# Altium PCB PCB1.PcbDoc
Units mm, origin at the board's own origin, x right, y up, seen from the top; angles counter-clockwise.
Board outline 103.63 x 74.17 mm, 4 copper layers (L1[SGN], L2[GND], L3[GND], L4[SGN]), stack 1.591 mm thick; 62 components, 49 nets, 238 pads, 79 vias.
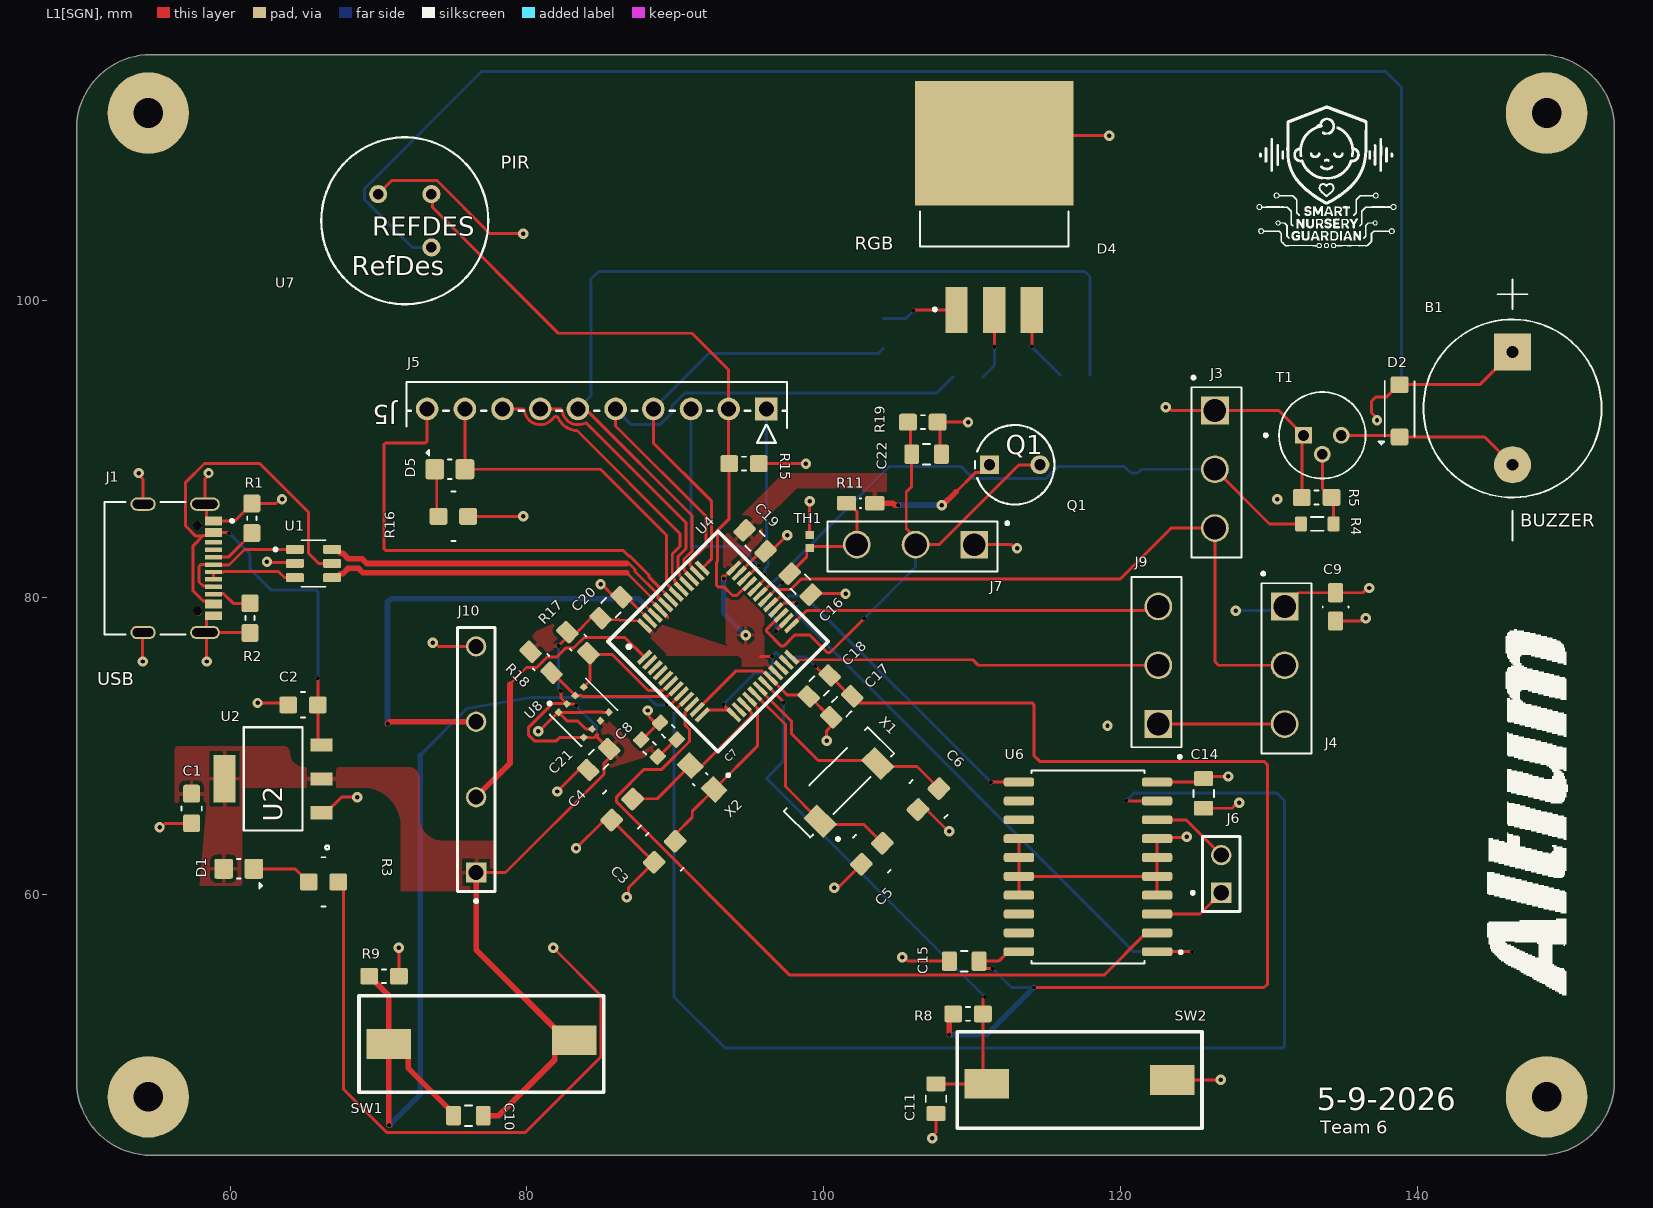
[diagram p0: L1[SGN] view]
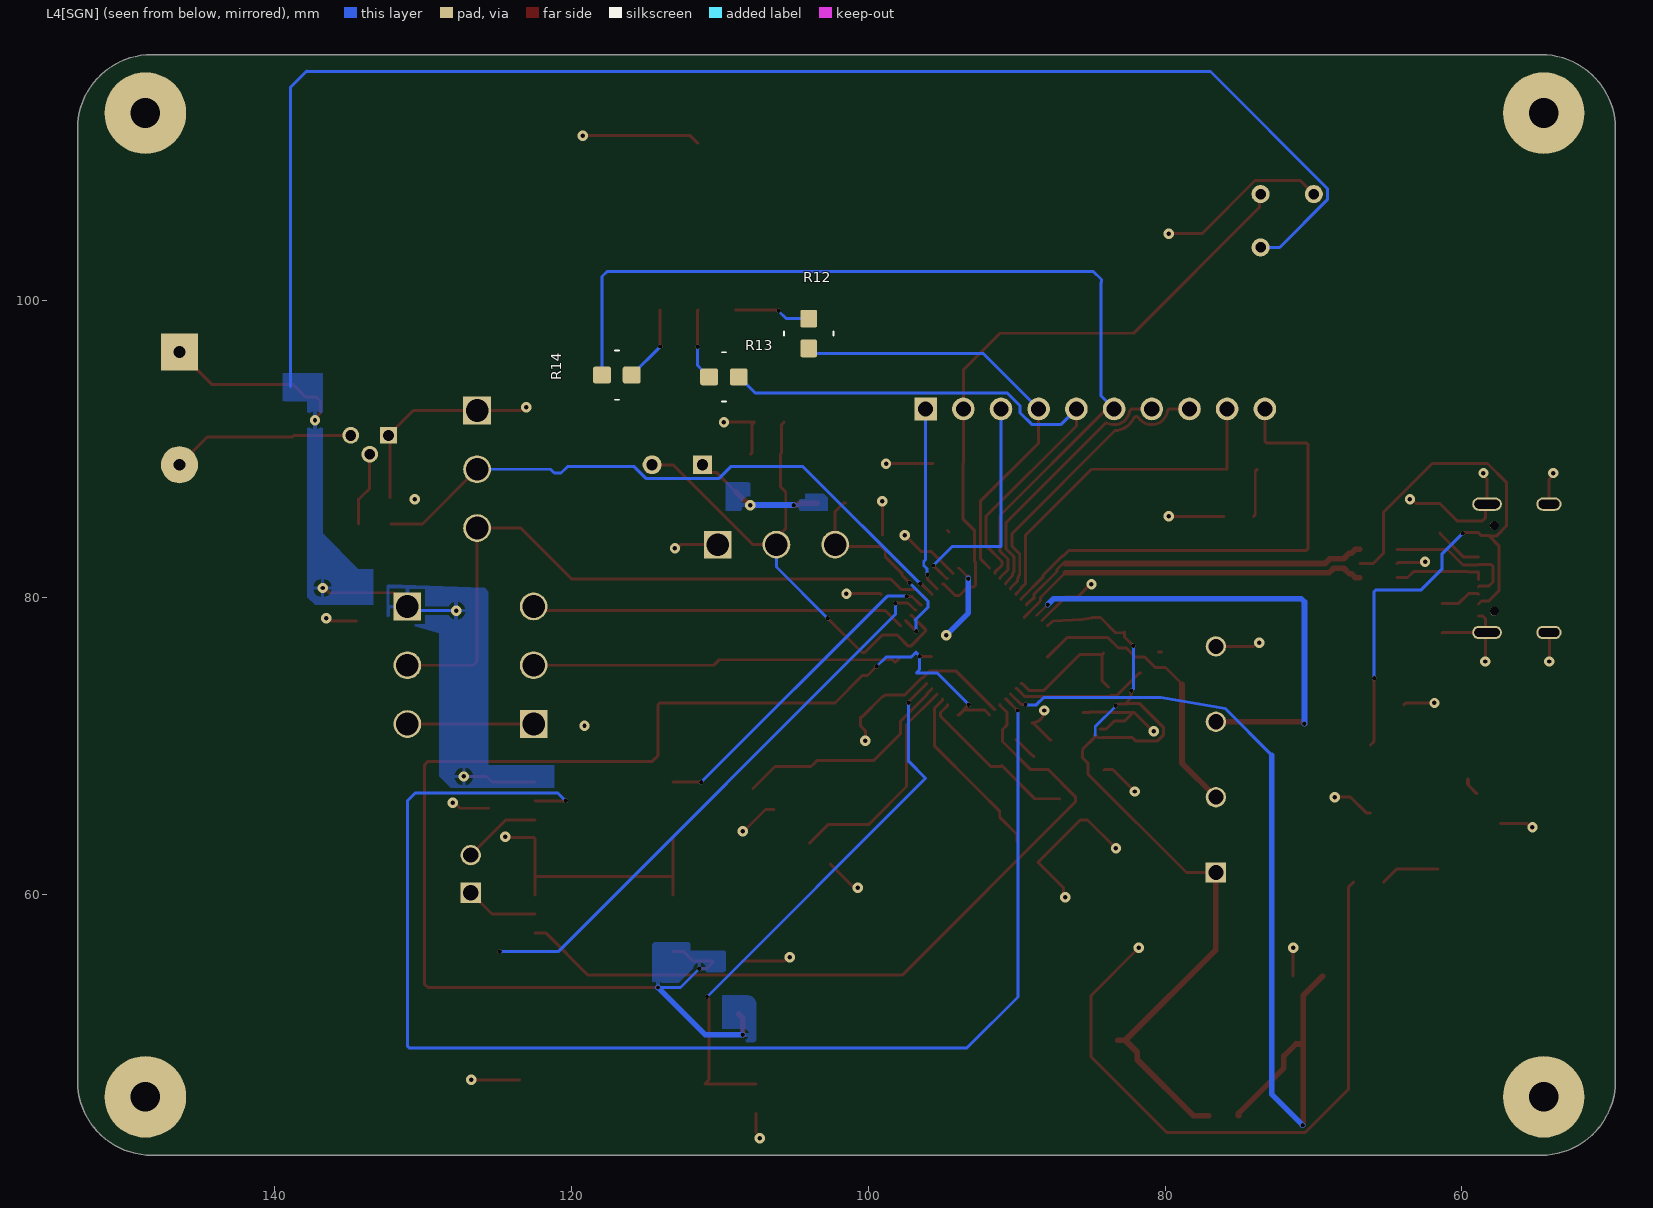
[diagram p1: L4[SGN] view, seen from below]
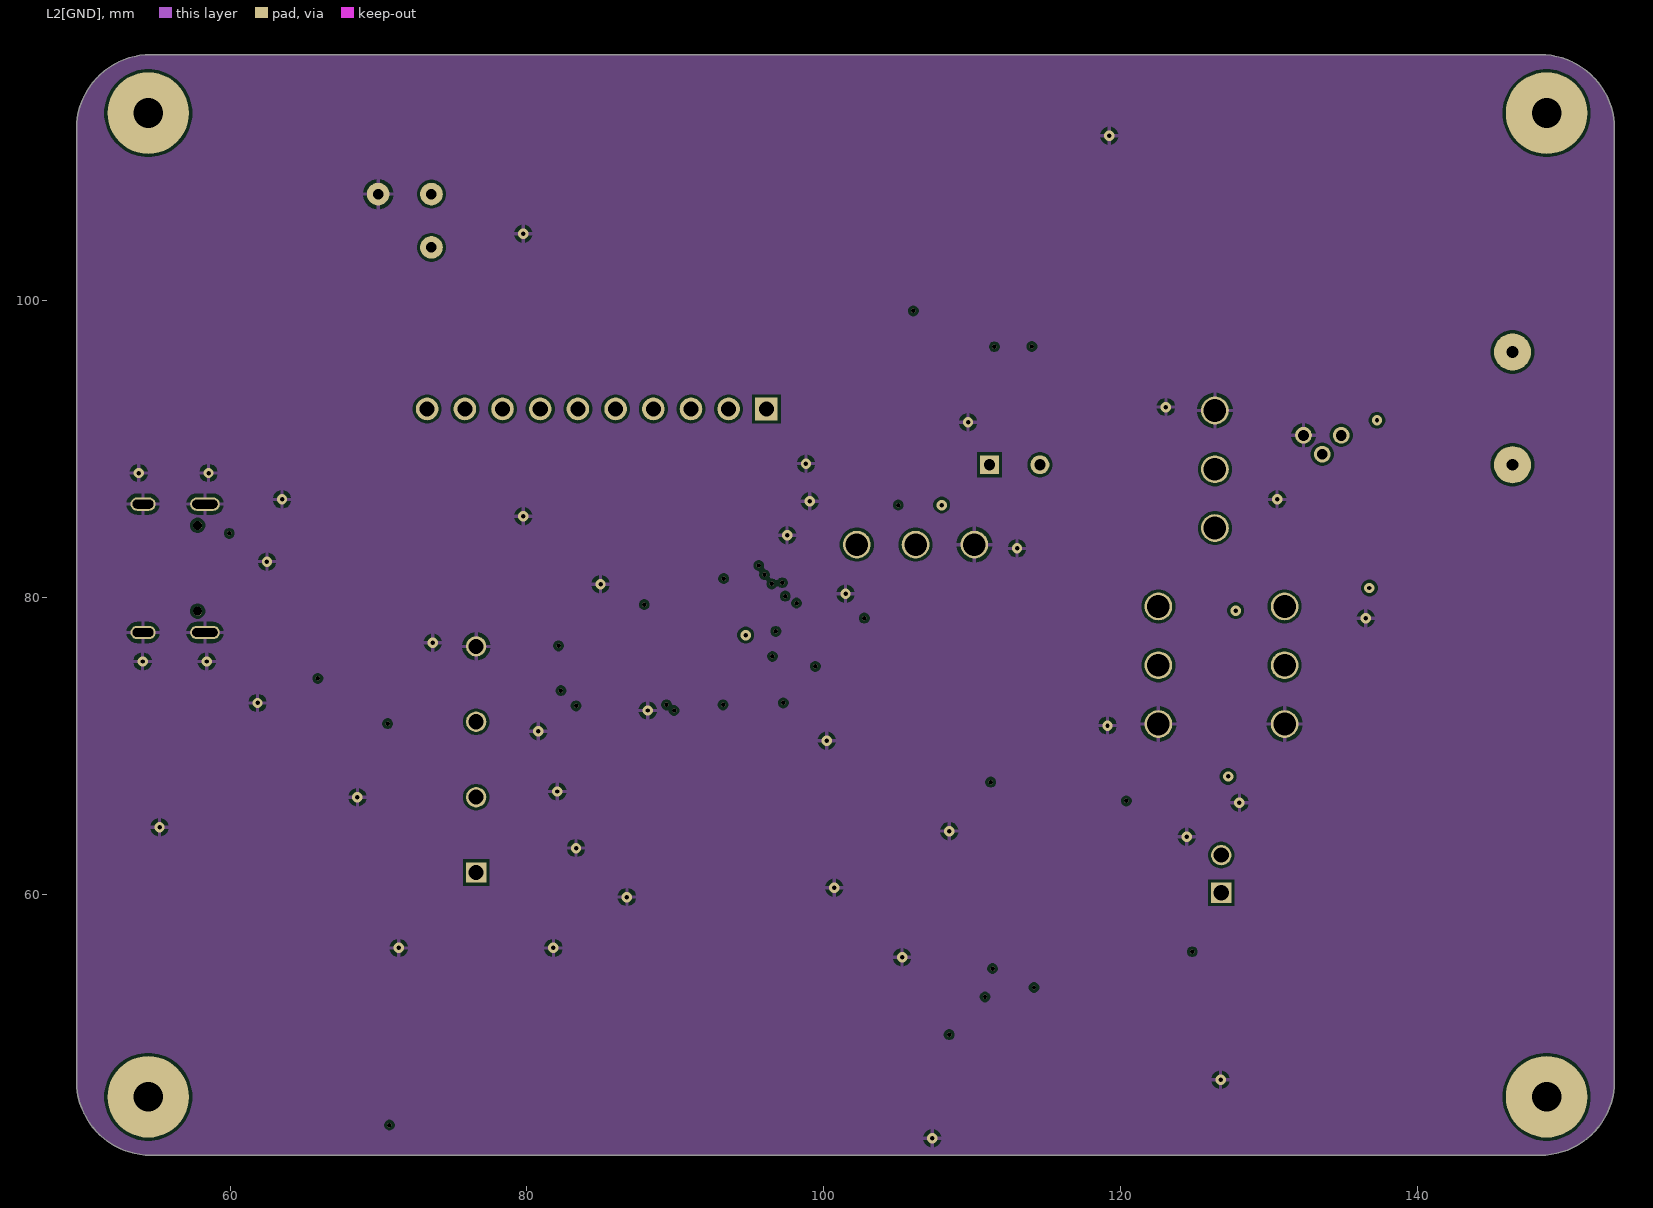
[diagram p2: L2[GND]]
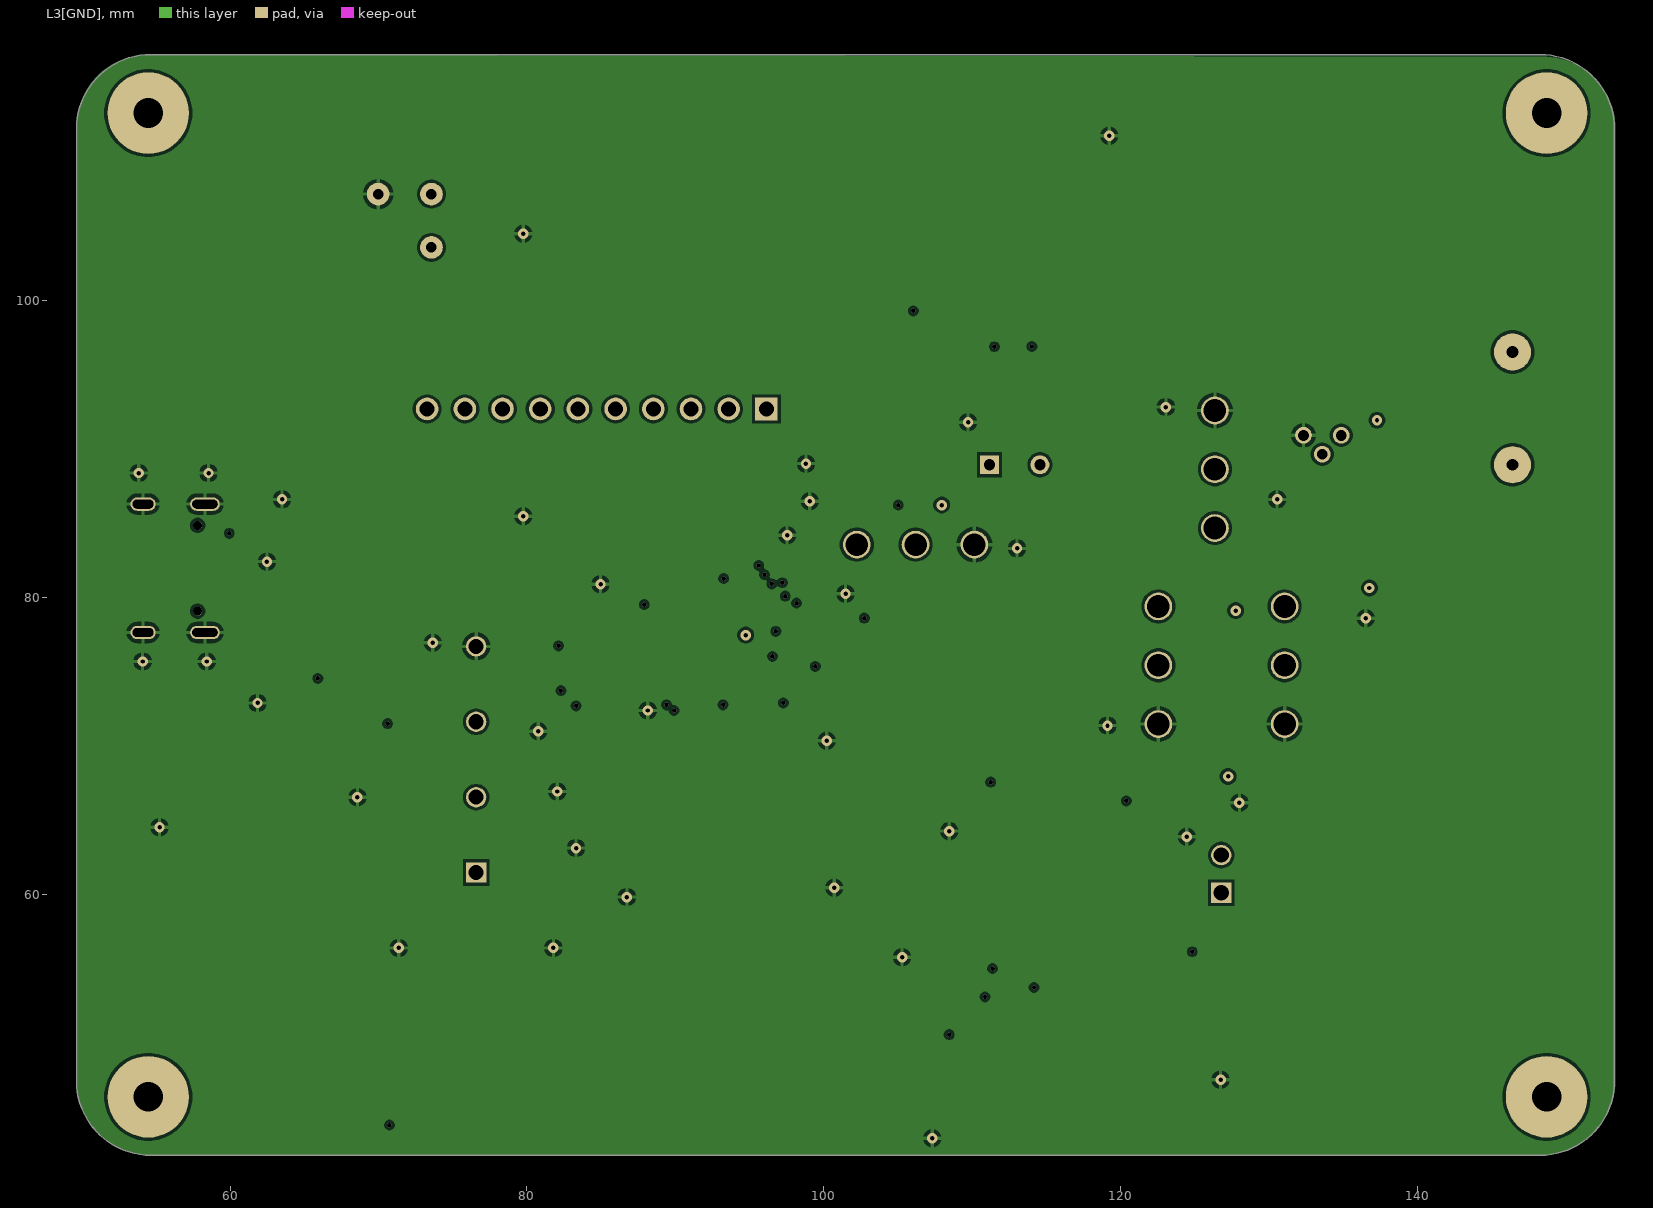
[diagram p3: L3[GND]]

## Layer stack, top to bottom
Top Solder: solder mask 0.0254, SM-001, Dk 4
L1[SGN]: signal copper 0.035
Dielectric 2: prepreg 0.2104, PP-017, Dk 4.3
L2[GND]: signal copper 0.0175
Dielectric 3: core 1.065, Core-039, Dk 4.6
L3[GND]: signal copper 0.0175
Dielectric 4: prepreg 0.2104, PP-017, Dk 4.3
L4[SGN]: signal copper 0.035
Bottom Solder: solder mask 0.0254, SM-001, Dk 4

## Board outline
49.657,47.418 49.657,111.586 cw(c54.657,111.586) 54.657,116.586 148.289,116.586 cw(c148.289,111.586) 153.289,111.586 153.289,47.418 cw(c148.289,47.418) 148.289,42.418 54.657,42.418 cw(c54.657,47.418)

## Design rules (kind name [scope] priority, off if disabled: settings)
Clearance [All] p1: gap=0.2 ignorepadtopadclearanceinfootprint=FALSE
ComponentClearance [All] p1: gap=0.254 collisioncheckmode=3 verticalgap=0.254 showdistances=FALSE checkcomponentboundary=TRUE
DiffPairsRouting [All] p1: maxlimit=0.254 minlimit=0.254 mostfreqgap=0.254 toplayer_minwidth=0.2 toplayer_maxwidth=0.381 toplayer_prefwidth=0.381 midlayer1_minwidth=0.2 midlayer1_maxwidth=0.381 midlayer1_prefwidth=0.381 midlayer2_minwidth=0.2 midlayer2_maxwidth=0.381 midlayer2_prefwidth=0.381 bottomlayer_minwidth=0.2 bottomlayer_maxwidth=0.381 bottomlayer_prefwidth=0.381 maxuncoupledlength=12.7
MinimumSolderMaskSliver [All] p1: minsoldermaskwidth=0.1
NetAntennae [All] p1: netantennaetolerance=1
PolygonConnect [All] p1: connectstyle=Relief reliefconductorwidth=0.254 reliefentries=4 polygonreliefangle="90 Angle" airgapwidth=0.254
RoutingVias [All] p1: holewidth=0.3 width=0 viastyle="Through Hole" minholewidth=0.15 minwidth=0.25 maxholewidth=0.5 maxwidth=0.9
SilkToSolderMaskClearance [IsPad] p1: minsilkscreentomaskgap=0.15 clearancetoexposedcopper=FALSE
SolderMaskExpansion [All] p1: expansion=0 istentingtop=FALSE
SupplyNets "Schematic Supply Nets_3" [InNet('VBUS')] p1: voltage=0.000
SupplyNets "Schematic Supply Nets_2" [InNet('+3V3')] p2: voltage=0.000
SupplyNets "Schematic Supply Nets_1" [InNet('GND')] p3: voltage=0.000
SupplyNets "Schematic Supply Nets" [InNet('+5')] p4: voltage=0.000
UnRoutedNet [All] p1: checkbadconnections=TRUE
Width [All] p1: maxlimit=2 minlimit=0.15 preferedwidth=0.2
24 further rules are at their usual default settings.

## Classes and differential pairs
component class MCU: B1 C3 C4 C5 C6 C7 C8 C9 C10 C11 C14 C15 C16 C17 C18 C19 C20 C21 C22 D2 D4 D5 J3 J4 J5 J6 J7 J9 J10 Q1 R4 R5 R8 R9 R11 R12 R13 R14 R15 R16 R17 R18 R19 SW1 SW2 T1 TH1 U4 U6 U7 U8 X1 X2
component class "LDO & USB": C1 C2 D1 J1 R1 R2 R3 U1 U2
differential pair USB: +USB_P -USB_N
differential pair ESD: +ESD_P -ESD_N

## Components (designator, comment, footprint, x,y, rotation, side; value= is the part's Value field where it differs from the comment)
B1 "Buzzer" Buzzer 146.431,92.837 r270 top
C1 "C-22uF" C-22uF 57.404,65.786 r90 top
C2 "C-10uF" C-10uF 64.913,72.771 r0 top
C3 "C-10pF" C-10pF 89.281,62.865 r45 top
C4 "C-10pF" C-10pF 86.415,65.714 r45 top
C5 "C-11pF" C-10pF 103.251,62.738 r45 top
C6 "C-11pF" C-10pF 107.061,66.421 r45 top
C7 "C-1uF" CAPC0804X80N 89.535,70.993 r315 top
C8 "C-10nF" CAPC0804X80N 88.265,69.85 r315 top
C9 "C-100uF" CAPC1709X35N 134.493,79.375 r270 top
C10 "C-100nF" CAPC1007X45N 76.057,45.085 r0 top
C11 "C-100nF" CAPC1007X45N 107.569,46.228 r90 top
C14 "C-100nF" CAPC1007X45N 125.603,66.802 r90 top
C15 "C-100nF" CAPC1007X45N 109.474,55.499 r180 top
C16 "C-100nF" CAPC1007X45N 98.425,80.899 r135 top
C17 "C-4.7uF" CAPC1007X45N 101.219,72.644 r45 top
C18 "C-100nF" CAPC1007X45N 99.695,74.041 r45 top
C19 "C-100nF" CAPC1007X45N 95.377,83.82 r135 top
C20 "C-100nF" CAPC1007X45N 85.67,79.32 r225 top
C21 "C-100nF" CAPC1007X45N 84.836,69.088 r45 top
C22 "C-100nF" CAPC1007X45N 106.934,89.662 r180 top
D1 "Green LED" "Green LED" 60.583,61.722 r180 top
D2 "1N4148" DIOM3413X180N 138.811,92.583 r90 top
D4 "RGB" RGB 111.379,105.156 r0 top
D5 "Yellow LED" "Green LED" 74.803,88.646 r0 top
J1 "USB Type-C" USB_Type-C 55.245,82.423 r270 top
J3 "3 PIN Header" "PIN 3 Header" 128.671,92.921 r90 top
J4 "Servo motor" "PIN 3 Header" 133.37,79.713 r90 top
J5 "10 PIN Header" "10 PIN HEADER" 84.683,86.996 r180 top
J6 "DC Motor" "2 PIN Header" 126.746,61.468 r0 top
J7 "3 PIN Header" "PIN 3 Header" 110.47,81.26 r0 top
J9 "3 PIN Header" "PIN 3 Header" 120.249,71.163 r270 top
J10 "4 PIN Header" "Header 4pin" 64.994,71.379 r90 top
Q1 "LDR" LDR 112.268,88.646 r0 top
R1 "R-5.1K" R-5.1K 61.468,85.344 r270 top
R2 "R-5.1K" R-5.1K 61.341,78.613 r90 top
R3 "R 220" R-220 66.294,60.833 r180 top
R4 "R-1K" RESC0804X45N 133.266,84.963 r0 top
R5 "R-10K" R-10K 133.223,86.741 r0 top
R8 "R-10K" R-10K 109.728,51.943 r0 top
R9 "R-10K" R-10K 70.374,54.483 r180 top
R11 "R-100K" RESC0503X35N 102.489,86.36 r0 top
R12 "R 220" R-220 104.013,97.79 r270 bottom
R13 "R 220" R-220 109.728,94.869 r180 bottom
R14 "R 220" R-220 116.951,94.996 r0 bottom
R15 "R-10K" R-10K 94.631,89.027 r180 top
R16 "R 220" R-220 75.041,85.471 r180 top
R17 "R-4.7K" RESC1007X50N 83.439,76.962 r315 top
R18 "R-4.7K" RESC1007X50N 80.954,75.637 r135 top
R19 "R-10K" R-10K 106.68,91.821 r180 top
SW1 "SWITCH" SWITCH 75.935,70.915 r0 top
SW2 "SWITCH" SWITCH 118.248,26.494 r180 top
T1 "2N2222" 2N2222 133.716,91.19 r0 top
TH1 "NTC Thermistor" NTC 97.294,83.527 r270 top
U1 "ESD" ESD 65.532,82.423 r0 top
U2 "LDO 3.3" "LDO 3.3" 63.627,67.818 r90 top
U4 "STM32F103C8T6" STM32 92.71,77.216 r45 top
U6 "L293D" L293D 117.811,61.861 r180 top
U7 "PIR" PIR 71.879,105.358 r0 top
U8 "Gas sensor" "Gas sensor" 83.82,72.136 r135 top
X1 "Crystal 32KHz" "Crystal 32KHz" 100.457,67.691 r135 top
X2 "Crystal 8MHz" "crystal 8Mz" 91.186,67.437 r225 top

## Footprints (in the part's own frame and the unit in brackets; to place one, negate y for a bottom-side part, rotate by r counter-clockwise, add the part's x,y. Pads: shape width x height; smd on the part's side, far side on the other; paste and mask are expansions set on the pad)
"2 PIN Header" [mm]
  rect 1.37x1.37 hole 1.02: 1(0.047,-1.365)
  round 1.37 hole 1.02: 2(0.047,1.175)
  silkscreen extent -1.97,-2.64 1.32,2.44, body extent -1.22,-2.76 1.32,2.32, height 3.94
2N2222 [mm]
  rect 1.13x1.13 / inner round 1.13 / far side rect 1.13x1.13 hole 0.73 mask+0.102: 1(-1.382,-0.258)
  round 1.13 hole 0.73 mask+0.102: 2(-0.112,-1.528) 3(1.158,-0.258)
  silkscreen extent -4.02,-3.17 2.81,2.66, body extent -3.13,-3.05 2.68,2.76, height 5.33
"10 PIN HEADER" [mil]
  rect 60x60 hole 40 paste-99999 mask+0: 1(-451.02,-224.96)
  round 60 hole 40 paste-99999 mask+0: 2(-351.02,-224.96) 3(-251.02,-224.96) 4(-151.02,-224.96) 5(-51.02,-224.96) 6(48.98,-224.96) 7(148.98,-224.96) 8(248.98,-224.96) 9(348.98,-224.96) 10(448.98,-224.96)
  silkscreen extent -506,-297 504,-135, body extent -501,-274 499,-176, height 335
Buzzer [mm]
  round 2.5 hole 0.8: N(3.89,-0.011)
  rect 2.5x2.5 / inner round 2.5 / far side rect 2.5x2.5 hole 0.8: P(-3.71,-0.011)
  silkscreen extent -8.6,-6.01 9.01,5.99, body extent -5.91,-6.01 6.09,5.99, height 7
C-10pF [mm] "Chip Capacitor, 2-Leads, Body 2.45x1.75mm, IPC Medium Density"
  rrect25% 1.2x1.14 smd: 1(-1,0) 2(1,0)
  silkscreen extent -0.14,-1.66 0.14,1.66, body extent -1.23,-0.88 1.22,0.88, height 0.85
C-10uF [mm] "Chip Capacitor, 2-Leads, Body 1.68x0.88mm, IPC Medium Density"
  rrect25% 1.2x1.14 smd: 1(-1,0) 2(1,0)
  silkscreen extent -0.14,-0.86 0.14,0.86, body extent -0.84,-0.44 0.84,0.44, height 0.7
C-22uF [mm] "Chip Capacitor, 2-Leads, Body 1.10x0.73mm, IPC Medium Density"
  rrect25% 1.2x1.14 smd: 1(-1,0) 2(1,0)
  silkscreen extent -0.14,-0.69 0.14,0.69, body extent -0.55,-0.36 0.55,0.36, height 0.7
CAPC0804X80N [mm] "Chip Capacitor, 2-Leads, Body 0.85x0.45mm, IPC Medium Density"
  rrect25% 0.8x0.9 smd: 1(-0.8,0) 2(0.8,0)
  silkscreen extent -0.14,-0.46 0.14,0.46, body extent -0.43,-0.23 0.42,0.22, height 0.8
CAPC1007X45N [mm] "Chip Capacitor, 2-Leads, Body 1.05x0.68mm, IPC Medium Density"
  rrect25% 1x1.3 smd: 1(-1,0) 2(1,0)
  silkscreen extent -0.24,-0.69 0.24,0.69, body extent -0.53,-0.34 0.53,0.34, height 0.45
CAPC1709X35N [mm] "Chip Capacitor, 2-Leads, Body 1.70x0.90mm, IPC Medium Density"
  rrect25% 1.3x1 smd: 1(-0.95,0) 2(0.95,0)
  silkscreen extent -0.04,-0.86 0.04,0.86, body extent -0.85,-0.45 0.85,0.45, height 0.35
"crystal 8Mz" [mm]
  rect 1.2x1.4 smd: 1(-0.753,1.271) 2(-0.75,-1)
  silkscreen extent -2.2,0 0,1.37, body extent -1.5,-1.6 0,1.6, height 0.25
"Crystal 32KHz" [mm]
  rect 1.9x1.3 smd paste+0 mask+0.102: 1(-1.46,2.445) 2(-1.46,-3.055)
  silkscreen extent -3.26,-4.31 0.75,3.7, body extent -1.71,-4.31 0.75,3.7, height 0.25
DIOM3413X180N [mm] "Molded Diode, 2-Leads, Body 3.45x1.30mm, IPC Medium Density"
  rrect25% 1.125x1.2 smd: A(-1.763,0) K(1.762,0)
  silkscreen extent -2.26,-1 2,1.42, body extent -1.73,-0.65 1.72,0.65, height 1.8
ESD [mm]
  rrect25% 1.21x0.59 smd: 1(-1.168,0.823) 2(-1.168,-0.127) 3(-1.168,-1.077) 4(1.342,-1.077) 5(1.342,-0.127) 6(1.342,0.823)
  silkscreen extent -2.57,-1.69 0.9,1.44, body extent -1.31,-1.59 1.49,1.34, height 0.4
"Gas sensor" [mm]
  rect 0.4x0.4 smd: 1(1.287,1.101) 2(1.287,0.301) 3(1.287,-0.499) 4(1.287,-1.299) 5(-1.113,-1.299) 6(-1.113,-0.499) 7(-1.113,0.301) 8(-1.113,1.101)
  silkscreen extent -1.41,-1.82 2.23,1.62, body extent -1.41,-1.6 1.59,1.4, height 1
"Green LED" [mm] "MELF Diode, 2-Leads, Body 2.25x1.10mm, IPC Medium Density"
  rrect25% 1.275x1.35 smd: 1(-1.012,0) 2(1.012,0)
  silkscreen extent -1.59,-0.66 0.11,1.32, body extent -1.25,-0.6 1.25,0.6, height 1.2
"Header 4pin" [mm]
  rect 1.37x1.37 hole 1.02: 1(-9.911,-11.587)
  round 1.37 hole 1.02: 2(-4.831,-11.587) 3(0.249,-11.587) 4(5.329,-11.587)
  silkscreen extent -11.93,-12.86 6.6,-10.32, body extent -11.2,-12.75 6.7,-10.21, height 8.38
L293D [mm]
  rrect50% 2.05x0.6 smd: 1(-4.656,5.727) 2(-4.656,4.457) 3(-4.656,3.187) 4(-4.656,1.917) 5(-4.656,0.647) 6(-4.656,-0.623) 7(-4.656,-1.893) 8(-4.656,-3.163) 9(-4.656,-4.433) 10(-4.656,-5.703) 11(4.654,-5.703) 12(4.654,-4.433) 13(4.654,-3.163) 14(4.654,-1.893) 15(4.654,-0.623) 16(4.654,0.647) 17(4.654,1.917) 18(4.654,3.187) 19(4.654,4.457) 20(4.654,5.727)
  silkscreen extent -6.35,-6.49 3.8,6.51, body extent -5.16,-6.39 5.16,6.41, height 2.65
"LDO 3.3" [mil]
  rect 35x58 smd paste+0 mask+0: 1(-91.57,-99.72) 2(-1.42,-99.72) 3(88.74,-99.72)
  rect 126x58 smd paste+0 mask+0: 4(-1.42,157.28)
  silkscreen extent -188,-120 136,107, body extent -133,-115 131,172, height 71
LDR [mm]
  rect 1.27x1.27 hole 0.762 paste-2539.97 mask+0: 1(-1.095,0.302)
  round 1.27 hole 0.762 paste-2539.97 mask+0: 2(2.305,0.302)
  silkscreen extent -2.07,-2.38 3.28,2.98, body extent -1.95,-2.25 3.19,2.85, height 2.4
NTC [mm]
  rect 0.54x0.6 smd: 1(-0.674,1.766) 2(0.19,1.766)
  body extent -0.74,1.52 0.26,2.02, height 0.55
"PIN 3 Header" [mm]
  rect 1.87x1.87 / inner round 1.87 / far side rect 1.87x1.87 hole 1.52 mask+0.102: 1(-0.315,2.306)
  round 1.87 hole 1.52 mask+0.102: 2(-4.275,2.306) 3(-8.235,2.306)
  silkscreen extent -10.22,0.51 2,3.88, body extent -9.5,1 0.66,3.54, height 6.5
PIR [mil]
  round 48 / inner round 60 / far side round 48 hole 28 paste-99999 mask+0: 1(-74.88,72.05) 2(66.54,72.05) 3(66.54,-69.37)
  silkscreen extent -226,-220 217,223, body extent -221,-215 212,218, height 567
R-5.1K [mm] "Chip Resistor, 2-Leads, Body 0.53x0.28mm, IPC Medium Density"
  rrect25% 1.2x1.14 smd: 1(-1,0) 2(1,0)
  silkscreen extent -0.14,-0.31 0.14,0.31, body extent -0.26,-0.14 0.26,0.14, height 0.45
R-10K [mm] "Chip Resistor, 2-Leads, Body 0.85x0.45mm, IPC Medium Density"
  rrect25% 1.2x1.14 smd: 1(-1,0) 2(1,0)
  silkscreen extent -0.14,-0.46 0.14,0.46, body extent -0.43,-0.23 0.43,0.22, height 0.45
R-220 [mm] "Chip Resistor, 2-Leads, Body 3.22x1.70mm, IPC Medium Density"
  rrect25% 1.2x1.14 smd: 1(-1,0) 2(1,0)
  silkscreen extent -0.14,-1.66 0.14,1.66, body extent -1.61,-0.85 1.61,0.85, height 0.55
RESC0503X35N [mm] "Chip Resistor, 2-Leads, Body 0.53x0.28mm, IPC Medium Density"
  rrect25% 1.3x1 smd: 1(-0.95,0) 2(0.95,0)
  silkscreen extent -0.04,-0.31 0.04,0.31, body extent -0.26,-0.14 0.26,0.14, height 0.35
RESC0804X45N [mm] "Chip Resistor, 2-Leads, Body 0.85x0.45mm, IPC Medium Density"
  rrect25% 0.8x1 smd: 1(-1.1,0) 2(1.1,0)
  silkscreen extent -0.44,-0.46 0.44,0.46, body extent -0.43,-0.23 0.43,0.22, height 0.45
RESC1007X50N [mm] "Chip Resistor, 2-Leads, Body 1.05x0.68mm, IPC Medium Density"
  rrect25% 1.3x1 smd: 1(-1,0) 2(1,0)
  silkscreen extent -0.09,-0.69 0.09,0.69, body extent -0.53,-0.34 0.53,0.34, height 0.5
RGB [mm]
  rect 1.5x3.1 smd: 1(-2.43,-5.787) 2(0.11,-5.787) 3(2.65,-5.787)
  rect 10.7x8.4 smd: 4(0.11,5.463)
  silkscreen extent -4.89,-5.84 5.11,0.86, body extent -4.89,-6.76 5.11,9.09, height 3.3
STM32 [mm]
  rect 0.3x1.2 smd paste-2539.97: 1(-2.75,-4.5) 2(-2.25,-4.5) 3(-1.75,-4.5) 4(-1.25,-4.5) 5(-0.75,-4.5) 6(-0.25,-4.5) 7(0.25,-4.5) 8(0.75,-4.5) 9(1.25,-4.5) 10(1.75,-4.5) 11(2.25,-4.5) 12(2.75,-4.5) 25(2.75,4) 26(2.25,4) 27(1.75,4) 28(1.25,4) 29(0.75,4) 30(0.25,4) 31(-0.25,4) 32(-0.75,4) 33(-1.25,4) 34(-1.75,4) 35(-2.25,4) 36(-2.75,4)
  rect 1.2x0.3 smd paste-2539.97: 13(4.25,-3) 14(4.25,-2.5) 15(4.25,-2) 16(4.25,-1.5) 17(4.25,-1) 18(4.25,-0.5) 19(4.25,0) 20(4.25,0.5) 21(4.25,1) 22(4.25,1.5) 23(4.25,2) 24(4.25,2.5) 37(-4.25,2.5) 38(-4.25,2) 39(-4.25,1.5) 40(-4.25,1) 41(-4.25,0.5) 42(-4.25,0) 43(-4.25,-0.5) 44(-4.25,-1) 45(-4.25,-1.5) 46(-4.25,-2) 47(-4.25,-2.5) 48(-4.25,-3)
  silkscreen extent -5.25,-5.5 5.25,5, body extent -4.6,-4.85 4.6,4.35, height 1.6
SWITCH [mm]
  rect 3x2 smd paste-2539.97: 1(-5.25,-21) 2(7.25,-20.75)
  silkscreen extent -7.25,-24.25 9.25,-17.75, body extent -5.25,-22.9 7.25,-18.61, height 4.95
USB_Type-C [mm]
  rect 0.6x1.14 smd mask+0.05: A1(3.65,3.638) A4(2.85,3.638) B1(-2.75,3.638) B4(-1.95,3.638)
  rect 0.3x1.14 smd mask+0.05: A5(2.2,3.638) A6(1.2,3.638) A7(0.2,3.638) A8(-1.3,3.638) B5(-0.3,3.638) B6(0.7,3.638) B7(1.7,3.638) B8(-0.8,3.638)
  oval 0.9x2 hole 0.6 slot 1.7 at 90 deg: S1(-3.875,3.058) S2(4.775,3.058)
  oval 0.9x1.7 hole 0.6 slot 1.4 at 90 deg: S3(-3.875,-1.112) S4(4.775,-1.112)
  round 0.6 hole 0.6 unplated: ""(-2.44,2.568) ""(3.34,2.568)
  silkscreen extent -4.02,-3.71 4.92,4.99, body extent -4.02,-3.71 4.92,4.19, height 3.31

## Part data
B1: "Through Hole Alarms, Buzzers, and Sirens RoHS", MFR=CUI, MFR PART#=CMI-1210-5-95T, ComponentLink1Description="New link", ComponentLink1URL=https://www.lcsc.com/product-detail/C6485139.html?s_z=n_q_CMI-1210-5-95T&spm=wm.fly.bg.0.xh&lcsc_vid=T1EIXgIEFgJdUgdfFAVeA1ADFlcIAQJWFVRdA1ZXFlMxVlNeT1JbX1FfQ1lXVDsOAxUeFF5JWBYZEEoKFBINSQcJGk4eFQsCAgIaSgADAwAHC0slRlNXVlFXWQkaCgg%3D, SUPPLIER=LCSC, SUPPLIER PART#=C6485139
C1: MFR=muRata, ComponentLink1Description="New link", ComponentLink2Description="New link 1", ComponentLink2URL=https://www.lcsc.com/product-detail/C86816.html?s_z=n_q_t_Capacitor%252022uf&spm=wm.fly.bg.0.cbh___wm.ssy.tc.0.tz&lcsc_vid=QgVYVVJWE1VfXwZQRQQNBFIETgIPBFxQQFYPXlAFEgMxVlNeQFVeXlFSR1laVzsOAxUeFF5JWBYZEEoKFBINSQcJGk4eFQsCAgIaSgADAwAHC0slRlJbX1FIHxUDCw%3D%3D, MJFR PART #=GRM21BR61E226ME44L, SUPPLIER=LCSC, SUPPLIER PART #=C86816
C2: MFR="Samsung Electro-Mechanics", MFR PART #=CL31A106KBHNNNE, ComponentLink1Description="New link", ComponentLink1URL=https://www.lcsc.com/product-detail/C13585.html?s_z=n_q_t_Capacitor%252010u&spm=wm.fly.bg.0.cbh___wm.ssy.tc.0.tz&lcsc_vid=QgVYVVJWE1VfXwZQRQQNBFIETgIPBFxQQFYPXlAFEgMxVlNeQFVeXldRQVBdXjsOAxUeFF5JWBYZEEoKFBINSQcJGk4dAgUUFAk%3D, SUPPLIER=LCSC, SUPPLIER PART #=C13585
C3 C4: MFR="Samsung Electro-Mechanics", MFR PART #=CL10C100JB8NNNC, ComponentLink1Description="New link", ComponentLink1URL=C1634, SUPPLIER=LCSC, SUPPLIER PART #=C1634
C5 C6: MFR=muRata, MFR PART=GRM0335C1E110JA01D, SUPPLIER=LCSC, SUPPLIER PART #=C2183483
C7: MFR="Samsung Electro-Mechanics", MFR PART#=CL10B105KA8NNNC, ComponentLink1Description="New link", ComponentLink1URL=https://www.lcsc.com/product-detail/C29936.html?s_z=n_q_t_Capacitor%25201uF&spm=wm.fly.bg.0.cbh___wm.ssy.tc.0.tz&lcsc_vid=QgVYVVJWE1VfXwZQRQQNBFIETgIPBFxQQFYPXlAFEgMxVlNeQFJXUFdQT1hcVzsOAxUeFF5JWBYZEEoKFBINSQcJGk4eFQsCAgIaSgADAwAHC0slRlFeV1BUWQkaCgg%3D, SUPPLIER=LCSC, SUPPLIER PART#=C29936
C8: MFR=YAGEO, MFR PART #=CC0603KRX7R9BB103, ComponentLink1Description="New link", ComponentLink1URL=https://www.lcsc.com/product-detail/C100042.html?s_z=n_q_t_capacitor%252010nf&spm=wm.fly.bg.0.cbh___wm.ssy.tc.0.tz&lcsc_vid=QgVYVVJWE1VfXwZQRQQNBFIETgIPBFxQQFYPXlAFEgMxVlNeQFJXUFVVQFVZXjsOAxUeFF5JWBYZEEoKFBINSQcJGk4eFQsCAgIaSgADAwAHC0slRlBWVVxeWQkaCgg%3D, SUPPLIER=LCSC, SUPPLIER PART#=C100042
C9: "CAP CER 100uF 6.3V X5R 1206", MFR="Samsung Electro-Mechanics", MFR PART#=CL31A107MQHNNNE, ComponentLink1Description="New link", ComponentLink1URL=https://www.lcsc.com/product-detail/C15008.html?s_z=n_q_t_Capacitor%2520100u&spm=wm.fly.bg.0.xh___wm.ssy.tc.0.tz&lcsc_vid=T1EIXgIEFgJdUgdfFAVeA1ADFlcIAQJWFVRdA1ZXFlMxVlNeT1JZV1BfR1VbUTsOAxUeFF5JWBYZEEoKFBINSQcJGk4NBhADEA4cHktRTlNADxALGw%3D%3D, SUPPLIER=LCSC, SUPPLIER PART#=C15008
C10 C11 C14 C15 C16 C18 C19 C20 C21 C22: MFR=TDK, MFR PART#=CGA5L2X7R2A104KT0Y0U, ComponentLink1Description="New link", ComponentLink1URL=https://www.lcsc.com/product-detail/C338057.html?s_z=n_q_C338057&globalKeyword=C338057, SUPPLIER=LCSC, SUPPLIER PART#=C338057
C17: MFR=SAMYOUNG, MFR PART #="MVK 50V4.7 5*5.2", ComponentLink1Description="New link", ComponentLink1URL=https://www.lcsc.com/product-detail/C165626.html?s_z=n_q_C165626&globalKeyword=C165626, SUPPLIER=LCSC, SUPPLIER PART #=C165626
D1: MFR=NATIONSTAR, ComponentLink1Description="New link", ComponentLink1URL=https://www.lcsc.com/product-detail/C84260.html?s_z=n_q_t_Green%2520led&spm=wm.fly.bg.0.cbh___wm.ssy.tc.0.tz&lcsc_vid=QgVYVVJWE1VfXwZQRQQNBFIETgIPBFxQQFYPXlAFEgMxVlNeQFVcUVVXTlJaUzsOAxUeFF5JWBYZEEoKFBINSQcJGk4eFQsCAgIaSgADAwAHC0slRlJbX1FIHxUDCw%3D%3D, MFR PART #=NATIONSTAR, SUPPLIER=LCSC, SUPPLIER PART #=C84260
D2: "DIODE GP 100V 200mA DO-35", MFR=onsemi, ComponentLink1Description="New link", ComponentLink1URL=https://www.lcsc.com/product-detail/C258182.html?s_z=n_q_x_1N4148&spm=wm.ssy.em.0.tz&lcsc_vid=T1EIXgIEFgJdUgdfFAVeA1ADFlcIAQJWFVRdA1ZXFlMxVlNeT1JbXlNXRVlfUTsOAxUeFF5JWBYZEEoKFBINSQcJGk4eFQsCAgIaSgADAwAHC0slRVFYVlJVRlhADxALGw%3D%3D, MFR PART#=1N4148, SUPPLIER=LCSC, SUPPLIER PART#=C258182
D4: "12x12 Red, Green, Blue(RGB) LED Dot Matrix and Cluster RoHS", MFR=Inolux, MFR PART#=INCM88001, ComponentLink1Description="New link", ComponentLink1URL=https://www.lcsc.com/product-detail/C7288959.html?s_z=n_q_t_RGB%2520LED&spm=wm.fly.bg.0.xh___wm.ssy.tc.0.tz&lcsc_vid=T1EIXgIEFgJdUgdfFAVeA1ADFlcIAQJWFVRdA1ZXFlMxVlNeT1JYVVBXTlBYVjsOAxUeFF5JWBYZEEoKFBINSQcJGk4eFQsCAgIaSgADAwAHC0slRVRWVlxUWQkaCgg%3D, SUPPLIER=LCSC, SUPPLIER PART#=C7288959
D5: "LED YELLOW WATER CLEAR 0402 SMD", MFR=YONGYUTAI, MFR PART#=YLED0402Y, ComponentLink1Description="New link", ComponentLink1URL=https://www.lcsc.com/product-detail/C20608782.html?s_z=n_q_t_Yellow%2520led&spm=wm.fly.bg.0.xh___wm.ssy.tc.0.tz&lcsc_vid=T1EIXgIEFgJdUgdfFAVeA1ADFlcIAQJWFVRdA1ZXFlMxVlNeT1JYVFBRQFZbUDsOAxUeFF5JWBYZEEoKFBINSQcJGk4eFQsCAgIaSgADAwAHC0slQFNWX11TTk8GEwkK, SUPPLIER=LCSC, SUPPLIER PART#=C20608782
J1: MFR="Korean Hroparts Elec", MFR PART #=TYPE-C-31-M-12, ComponentLink1Description="New link", ComponentLink1URL=https://www.lcsc.com/product-detail/C165948.html?s_z=n_q_p_USB%2520type%2520c&spm=wm.ssy.bg.1.cbh&lcsc_vid=QgVYVVJWE1VfXwZQRQQNBFIETgIPBFxQQFYPXlAFEgMxVlNeQFVeVFZQRVNcVjsOAxUeFF5JWBYZEEoKFBINSQcJGk4eFQsCAgIaSgADAwAHC0slRVBWVFBeRE8GEwkK, SUPPLIER=LCSC, SUPPLIER PART #=C165948
J4: library part "3 PIN Header", ComponentLink1Description="New link"
J6: library part "2 PIN Header", "Pin Header 2 Position Dual Row Through Hole -55℃~+125℃", MFR=Samtec, MFR PART#=MTSW-101-09-L-D-515, ComponentLink1Description="New link", ComponentLink1URL=https://www.lcsc.com/product-detail/C5684114.html?s_z=n_q_MTSW-101-09-L-D-515&spm=wm.fly.bg.0.cbh&lcsc_vid=T1EIXgIEFgJdUgdfFAVeA1ADFlcIAQJWFVRdA1ZXFlMxVlNeT1JYX1JeRVhXUjsOAxUeFF5JWBYZEEoKFBINSQcJGk4eFQsCAgIaSgADAwAHC0slRVhZVlZfRE8GEwkK, SUPPLIER=LCSC, SUPPLIER PART#=C5684114
J10: MFR=hanxia, MFR PART #="HX PH254-01-04-Z-L11.5 straight pin header", ComponentLink1Description="New link", ComponentLink1URL=https://www.lcsc.com/product-detail/C52016392.html?s_z=n_q_t_4%2520PIN%2520Header&spm=wm.fly.bg.0.xh___wm.ssy.tc.0.tz&lcsc_vid=QgVYVVJWE1VfXwZQRQQNBFIETgIPBFxQQFYPXlAFEgMxVlNeQFVcUFVeQFNaVjsOAxUeFF5JWBYZEEoKFBINSQcJGk4eFQsCAgIaSgADAwAHC0slRVNXUVZIHxUDCw%3D%3D, SUPPLIER=LCSC, SUPPLIER PART #=C52016392
Q1: "Silicon NPN Phototransistor, RoHS Compliant", MFR=VISHAY, MFR PART#=TEMT1020, ComponentLink1Description="New link", ComponentLink1URL=https://www.lcsc.com/product-detail/C129151.html?s_z=n_q_TEMT1020&spm=wm.fly.bg.0.xh&lcsc_vid=T1EIXgIEFgJdUgdfFAVeA1ADFlcIAQJWFVRdA1ZXFlMxVlNeT1JbUFFXRVNdVzsOAxUeFF5JWBYZEEoKFBINSQcJGk4NBhADEA4cHktXRVZcSQwSGg0%3D, SUPPLIER=LCSC, SUPPLIER PART#=C129151
R1 R2: MFR=YAGEO, MFR PART #=RC0402FR-075K1L, ComponentLink1Description="New link", ComponentLink1URL=https://www.lcsc.com/product-detail/C105872.html?s_z=n_q_p_Resistance%25205.1K&spm=wm.ssy.bg.0.cbh&lcsc_vid=QgVYVVJWE1VfXwZQRQQNBFIETgIPBFxQQFYPXlAFEgMxVlNeQFVeU1NTRFFbUTsOAxUeFF5JWBYZEEoKFBINSQcJGk4NBhADEA4cHktXRlVcSQwSGg0%3D, SUPPLIER=LCSC, SUPPLIER PART #=C105872
R3 R12 R13 R14 R16: MFR=UNI-ROYAL, MFR PART #=0603WAF2200T5E, ComponentLink1Description="New link", ComponentLink1URL=https://www.lcsc.com/product-detail/C22962.html?s_z=n_q_t_Resistor%2520220&spm=wm.fly.bg.0.cbh___wm.ssy.tc.0.tz&lcsc_vid=QgVYVVJWE1VfXwZQRQQNBFIETgIPBFxQQFYPXlAFEgMxVlNeQFVcUVFXRFlbXjsOAxUeFF5JWBYZEEoKFBINSQcJGk4dAgUUFAk%3D, SUPPLIER=LCSC, SUPPLIER PART #=C22962
R4: MFR=FOJAN, MFR PART #=FRC0603F1001TS, ComponentLink1Description="New link", ComponentLink1URL=https://www.lcsc.com/product-detail/C2907002.html?s_z=n_q_t_Resistor%25201k&spm=wm.fly.bg.0.cbh___wm.ssy.tc.0.tz&lcsc_vid=QgVYVVJWE1VfXwZQRQQNBFIETgIPBFxQQFYPXlAFEgMxVlNeQFRWX1ZeRFddVzsOAxUeFF5JWBYZEEoKFBINSQcJGk4eFQsCAgIaSgADAwAHC0slQlZZVVVXWQkaCgg%3D, SPN=LCSC, SPN PART#=C2907002
R5 R8 R9 R15 R19: MFR=YAGEO, MFR PART#=RC0603FR-0710KL, ComponentLink1Description="New link", ComponentLink1URL=https://www.lcsc.com/product-detail/C98220.html?s_z=n_q_t_Resistor%252010k&spm=wm.fly.bg.0.cbh___wm.ssy.tc.0.tz&lcsc_vid=QgVYVVJWE1VfXwZQRQQNBFIETgIPBFxQQFYPXlAFEgMxVlNeQFVWUlxQQVNaUDsOAxUeFF5JWBYZEEoKFBINSQcJGk4eFQsCAgIaSgADAwAHC0slRVZXXlFWT08GEwkK, SPN=LCSC, SPN PART #=C98220
R11: "RES 100kΩ ±1% 62.5mW 0402", MFR=YAGEO, MFR PART#=RC0402FR-07100KL, ComponentLink1Description="New link", ComponentLink1URL=https://www.lcsc.com/product-detail/C60491.html?s_z=n_q_t_Resistor%2520100&spm=wm.fly.bg.2.xh___wm.ssy.tc.0.tz&lcsc_vid=T1EIXgIEFgJdUgdfFAVeA1ADFlcIAQJWFVRdA1ZXFlMxVlNeT1JbU1FWRFFaVDsOAxUeFF5JWBYZEEoKFBINSQcJGk4eFQsCAgIaSgADAwAHC0slQ1NYUVFSWQkaCgg%3D, SUPPLIER=LCSC, SUPPLIER PART#=C60491
R17 R18: "RES 4.7kΩ ±1% 100mW 0603", MFR=YAGEO, MFR PART#=RC0603FR-074K7L, ComponentLink1Description="New link", ComponentLink1URL=https://www.lcsc.com/product-detail/C99782.html?s_z=n_q_t_Resistor%25204.7&spm=wm.fly.bg.0.xh___wm.ssy.tc.0.tz&lcsc_vid=T1EIXgIEFgJdUgdfFAVeA1ADFlcIAQJWFVRdA1ZXFlMxVlNeT1JZXlBQQFlfVjsOAxUeFF5JWBYZEEoKFBINSQcJGk4eFQsCAgIaSgADAwAHC0slRFFXU1FVQU8GEwkK, SPN=LCSC, SPN PART#=C99782
SW1 SW2: MFR=C&K, MFR PART#=L101011ML04Q, ComponentLink1Description="New link", ComponentLink1URL=https://www.lcsc.com/product-detail/C2799508.html?s_z=n_q_L101011ML04Q&spm=wm.fly.bg.0.cbh&lcsc_vid=QgVYVVJWE1VfXwZQRQQNBFIETgIPBFxQQFYPXlAFEgMxVlNeQFVWUlBeT1BYVDsOAxUeFF5JWBYZEEoKFBINSQcJGk4NBhADEA4cHktRTlNADxALGw%3D%3D, SPN=LCSC, SPN PART #=C2799508
T1: "NPN Plastic-Encapsulate Transistors", MFR="HXY MOSFET", MFR PART#=2N2222A, ComponentLink1Description="New link", ComponentLink1URL=https://www.lcsc.com/product-detail/C20616319.html?s_z=n_q_x_2N2222A&spm=wm.ssy.em.0.tz&lcsc_vid=T1EIXgIEFgJdUgdfFAVeA1ADFlcIAQJWFVRdA1ZXFlMxVlNeT1JbXlRVT1ZXXjsOAxUeFF5JWBYZEEoKFBINSQcJGk4NBhADEA4cHktXQFJaSQwSGg0%3D, SUPPLIER=LCSC, SUPPLIER PART#=C20616319
TH1: "THERMISTOR NTC 100kΩ 4250K 0402", MFR=muRata, MFR PART#=NCU15WF104D60RC, ComponentLink1Description="New link", ComponentLink1URL=https://www.lcsc.com/product-detail/C426654.html?s_z=n_q_NCU15WF104D60RC&spm=wm.fly.bg.0.xh&lcsc_vid=T1EIXgIEFgJdUgdfFAVeA1ADFlcIAQJWFVRdA1ZXFlMxVlNeT1JbVFFRT1FcXjsOAxUeFF5JWBYZEEoKFBINSQcJGk4MFQUIE0wKAhAHHg1BVl1fWQkaCgg%3D, SUPPLIER=LCSC, SUPPLIER PART#=C426654
U1: MFR=ST, MFR PART #=USBLC6-2SC6, ComponentLink1Description="New link", ComponentLink1URL=https://www.lcsc.com/product-detail/C7519.html?s_z=n_q_USBLC62SC6&spm=wm.fly.bg.0.xh&lcsc_vid=R1MIBQFWRANZAVdREQcIVV1fQVhaBlMEQwUKAQJQE1IxVlNeQFVeUldeRFBeVDsOAxUeFF5JWBYZEEoKFBINSQcJGk4dAgUUFAk%3D, SUPPLIER=LCSC, SUPPLIER PART #=C7519
U2: MFR="Advanced Monolithic Systems", MFR PART=AMS1117-3.3, MFR PART #=LTC1844ES5-3.3#TRMPBF, ComponentLink1Description="New link", ComponentLink1URL=https://www.lcsc.com/product-detail/C6186.html?s_z=n_q_AMS1117-3.3&spm=wm.fly.bg.0.cbh&lcsc_vid=QgVYVVJWE1VfXwZQRQQNBFIETgIPBFxQQFYPXlAFEgMxVlNeQFVeX1FTTlFbVzsOAxUeFF5JWBYZEEoKFBINSQcJGk4NBhADEA4cHktXR1JcSQwSGg0%3D, Suplier=LCSC, SUPPLIER=LCSC, SUPPLIER PART=C6186, SUPPLIER PART #=C580445
U4: "Medium-density performance line Arm-based 32-bit MCU with 64 or 128 KB Flash, USB, CAN, 7 timers, 2 ADCs, 9 com. interfaces", MFR=ST, ComponentLink1Description=DATASHEET, ComponentLink1URL=https://www.lcsc.com/datasheet/C8734.pdf?spm=wm.sxq.inf.ggs___wm.ssy.bg.0.xh&lcsc_vid=QgVYVVJWE1VfXwZQRQQNBFIETgIPBFxQQFYPXlAFEgMxVlNeQFJcUFVVRVZXXjsOAxUeFF5JWBYZEEoKFBINSQcJGk4%3D, ComponentLink2Description=LSCS, ComponentLink2URL=https://www.lcsc.com/product-detail/C8734.html?s_z=n_q_p_STM32F10C8T6&spm=wm.ssy.bg.0.xh&lcsc_vid=QgVYVVJWE1VfXwZQRQQNBFIETgIPBFxQQFYPXlAFEgMxVlNeQFJcUFVVRVZXXjsOAxUeFF5JWBYZEEoKFBINSQcJGk4%3D, MFR PART #=STM32F103C8T6, SUPPLIER=LSCS, SUPPLIER PART #=C8734
U6: "PUSH-PULL FOUR CHANNEL DRIVER WITH DIODES", MFR=ST, MFR PART#=L293DD, ComponentLink1Description="New link", ComponentLink1URL=https://www.lcsc.com/product-detail/C2971293.html?s_z=n_q_x_L293DD&spm=wm.ssy.em.0.tz&lcsc_vid=T1EIXgIEFgJdUgdfFAVeA1ADFlcIAQJWFVRdA1ZXFlMxVlNeT1JYUFdeT1dZVzsOAxUeFF5JWBYZEEoKFBINSQcJGk4NBhADEA4cHktSRlFADxALGw%3D%3D, SUPPLIER=LCSC, SUPPLIER PART#=C2971293
U7: "PIRs motion sensor", MFR=PANASONIC, MFR PART#=EKMC1601111, ComponentLink1Description="New link", ComponentLink1URL=https://www.lcsc.com/product-detail/C2684441.html?s_z=n_q_EKMC1601111&spm=wm.fly.bg.0.xh&lcsc_vid=T1EIXgIEFgJdUgdfFAVeA1ADFlcIAQJWFVRdA1ZXFlMxVlNeT1JbUVdSTllbUTsOAxUeFF5JWBYZEEoKFBINSQcJGk4NBhADEA4cHktXRVRdSQwSGg0%3D, SUPPLIER=LCSC, SUPPLIER PART#=C2684441
U8: MFR=Bosch, MFR PART#=BME688, ComponentLink1Description="New link", ComponentLink1URL=https://www.lcsc.com/product-detail/C3664478.html?s_z=n_q_x_BME688&spm=wm.ssy.em.0.tz&lcsc_vid=T1EIXgIEFgJdUgdfFAVeA1ADFlcIAQJWFVRdA1ZXFlMxVlNeT1JZVFFWRVJXXjsOAxUeFF5JWBYZEEoKFBINSQcJGk4dAgUUFAk%3D, SUPPLIER=LCSC, SUPPLIER PART #=C3664478
X1: "Crystal 32kHz ±100ppm 11pF 35kΩ DT-26", MFR=EPSON, MFR PART#="C-2 32.0000K-P:PBFREE", ComponentLink1Description="New link", ComponentLink1URL=https://www.lcsc.com/product-detail/C1669824.html?s_z=n_q_p_MC-306%252032.0000K-G%253A%2520PURE%2520SN.&spm=wm.ssy.bg.1.cbh&lcsc_vid=QgVYVVJWE1VfXwZQRQQNBFIETgIPBFxQQFYPXlAFEgMxVlNeQFVeV1NVQVVaVDsOAxUeFF5JWBYZEEoKFBINSQcJGk4NBhADEA4cHktXRlRbSQwSGg0%3D, SUPPLIER=LCSC, SUPPLIER PART #=C1669824
X2: "CRYSTAL 8MHz 12pF SMD", MFR="YXC Crystal Oscillators", MFR PART #=X32258MOB4SI, ComponentLink1Description="New link", ComponentLink1URL=https://www.lcsc.com/product-detail/C2682775.html?s_z=n_q_crystal%25208&spm=wm.fly.bg.0.cbh&lcsc_vid=QgVYVVJWE1VfXwZQRQQNBFIETgIPBFxQQFYPXlAFEgMxVlNeQFJXX1JeQlVYUDsOAxUeFF5JWBYZEEoKFBINSQcJGk4eFQsCAgIaSgADAwAHC0slRFJWV1FRWQkaCgg%3D, SUPPLIER=LCSC, SUPPLIER PART #=C2682775
J3 J7: ComponentLink1Description="New link"

## Free pads (board coordinates)
  round 5.5 hole 2 unplated paste-2539.97: H(54.483,46.355) H(54.483,112.649) H(148.717,46.355)
  round 5.5 hole 2 paste-2539.97: H(148.717,112.649)

## Via types
v1: diameter 0.7, hole 0.3, L1[SGN] to L4[SGN], 45 vias
v2: diameter 0.3, hole 0.3, L1[SGN] to L4[SGN], 34 vias

## Nets (pads, with @x,y where several pads share a name; then routed paths per layer and width w, separated by ;. In a path a pad name is that pad's centre, name@x,y a point inside that pad or via, vN(x,y) a via of type N, cw(c..) or ccw(c..) an arc to the next point about the centre after c; other vN are vias at no path point)
+3V3: C1.2 C7.2 C8.2 C10.2 C15.1 C17.2 C18.2 C19.2 C20.2 C21.2 D1.2 J10.1 Q1.1 R8.1 R11.2 R17.1 R18.2 SW1.2 U2.2 U2.4 U4.1 U4.9 U4.24 U4.36 U4.48 U6.20 U8.2 U8.6 U8.8 | length 172.9
  L1[SGN] w0.15: v2@93.257,81.356 93.89,81.989 U4.24
  L1[SGN] w0.2: U2.4@58.996,66.786 U2.4@59.57,67.361 ; J10.1 78.56,61.468 85.19,68.099 85.19,68.841 85.562,69.213 C21.2@85.562,69.689 ; R18.2 R18.2@80.44,76.344 ; v2(82.132,76.745) 82.732,77.345 R17.1@82.732,77.573 ; v2(82.296,73.729) 82.296,73.234 U8.2 ; R17.1 82.772,77.629 83.335,77.629 84.36,78.653 84.923,78.653 C20.2 85.599,78.507 87.548,78.418 U4.36 ; v2(83.312,72.7) 83.285,72.7 83.152,72.833 U8.2 ; C21.2 84.748,70.59 84.748,70.783 84.518,70.553 84.27,70.553 84.253,70.57 U8.8 82.209,70.57 81.981,70.343 80.503,70.343 80.122,70.724 80.122,71.262 81.71,72.85 82.539,72.85 82.556,72.833 U8.2 ; C8.2 89.104,69.506 89.816,70.217 C7.2@90.037,70.427 ; U4.48 92.144,72.408 93.559,72.408 93.877,72.089 U4.1@93.923,72.089 ; v2(93.218,72.771) 93.242,72.771 U4.1@93.923,72.089 ; U4.1 U4.1@93.923,72.089 ; C19.2@94.564,84.421 C19.2 ; 95.758,76.034 v2(96.548,76.034) ; v2(99.441,75.36) 100.052,74.748 C18.2 102.252,72.898 114.056,72.898 114.173,72.781 114.173,69.342 114.554,68.961 129.667,68.961 129.921,68.707 129.921,53.965 129.677,53.721 v2(114.173,53.721) ; 108.916,87.122 110.207,88.413 110.638,88.413 Q1.1 ; v2(111.379,54.999) 111.36,55.018 110.872,55.018 110.474,55.416 C15.1 111.797,55.499 112.432,56.134 U6.20 ; U2.4@59.57,67.361 59.632,67.423 U2.4 59.57,67.72 U2.4@59.57,67.361
  L1[SGN] w0.381: J10.1 76.581,56.269 SW1.2@82.685,50.165 ; C10.2 78.105,45.085 81.876,48.856 81.876,49.355 SW1.2@82.685,50.165 ; SW1.2 SW1.2@82.685,50.165 ; v2(93.257,81.28) v2@93.257,81.356 ; R11.2 104.66,86.36 104.789,86.231 v2(105.029,86.231) ; v1(107.95,86.233) 108.027,86.233 108.916,87.122 ; v2(108.458,50.546) 108.458,51.673 R8.1
  L4[SGN] w0.2: v2(82.132,76.745) 82.132,73.846 82.152,73.846 82.269,73.729 v2(82.296,73.729) ; v2(83.312,72.7) 84.709,71.303 84.709,70.739 ; v2(93.218,72.771) 95.377,74.93 96.755,74.93 96.548,75.137 v2(96.548,76.034) 96.548,76.061 96.774,76.287 96.774,76.327 97.117,75.984 98.817,75.984 v2(99.441,75.36) ; v2(111.379,54.999) 112.657,53.721 v2(114.173,53.721)
  L4[SGN] w0.381: v2(93.257,81.28) 93.257,78.955 v1(94.742,77.47) ; v2(105.029,86.231) 105.031,86.233 v1(107.95,86.233) ; v2(108.458,50.546) 110.998,50.546 v2(114.173,53.721)
+5: B1.P C9.1 C14.2 D2.K J4.1 U6.10 U7.3 | length 127.3
  L1[SGN] w0.2: U6.10 125.365,67.564 C14.2 125.746,67.945 v1(127.254,67.945) ; J4.1 131.991,80.325 C9.1 136.324,80.325 136.644,80.645 v1(136.779,80.645) ; v1(137.287,91.948) 137.287,92.083 136.906,92.464 136.906,93.218 137.192,93.504 137.91,93.504 138.752,94.345 144.218,94.345 B1.P
  L4[SGN] w0.2: U7.3 72.283,103.596 69.067,106.811 69.067,107.565 76.946,115.443 137.795,115.443 137.839,115.487 138.938,114.388 138.938,94.234 ; v1(127.762,79.121) 130.787,79.121 J4.1
BLUE: J5.6 R14.2 U4.27 | length 65.1
  L1[SGN] w0.2: J5.6 83.692,92.457 84.2,92.457 91.119,85.538 91.119,83.12 90.596,82.597 90.596,81.876 91.119,81.353 U4.27
  L4[SGN] w0.2: J5.6 84.323,93.594 84.323,101.224 84.284,101.263 84.284,101.429 84.836,101.981 117.602,101.981 117.951,101.632 R14.2
BOOT0: C10.1 R9.2 SW1.1 U4.44 | length 62.8
  L1[SGN] w0.2: v2(89.408,72.771) 89.427,72.79 89.698,72.79 U4.44
  L1[SGN] w0.381: R9.2 69.404,54.483 70.685,53.202 SW1.1 ; v2(70.739,44.45) 70.685,44.504 SW1.1 ; C10.1 75.057,45.235 71.994,48.298 71.994,49.105 71.185,49.915 SW1.1
  L4[SGN] w0.2: 72.807,69.375 75.949,72.517 80.283,73.279 88.168,73.279 88.676,72.771 v2(89.408,72.771)
  L4[SGN] w0.381: v2(70.739,44.45) 72.807,46.518 72.807,69.375
BOOT1: J5.1 U4.20 | length 12.6
  L1[SGN] w0.2: U4.20 95.998,81.211 95.998,81.52 v2(96.012,81.534)
  L4[SGN] w0.2: v2(96.012,81.534) 96.031,81.553 96.031,81.933 96.266,82.168 96.266,82.423 96.139,82.55 J5.1
BUZZER: J3.2 R4.1 U4.19 | length 42.5
  L1[SGN] w0.2: U4.19 96.399,80.905 96.485,80.905 v2(96.504,80.924) ; J3.2 130.048,84.963 R4.1
  L4[SGN] w0.2: v2(96.504,80.924) 104.399,88.819 109.277,88.819 110.083,88.013 114.96,88.013 115.766,88.819 120.275,88.819 120.702,88.392 121.158,88.392 121.412,88.646 J3.2
ESD_N: U1.6 U4.32 | length 24.4
  L1[SGN] w0.2: 86.741,82.296 86.876,82.296 87.285,81.887 87.285,81.759 88.846,80.198 88.846,79.949 88.879,79.916 ; 88.856,79.938 88.856,80.009 U4.32
  L1[SGN] w0.381: U1.6 67.184,83.246 67.448,82.982 67.598,82.982 67.966,82.614 68.895,82.614 69.212,82.296 86.741,82.296
ESD_P: U1.4 U4.33 | length 24.8
  L1[SGN] w0.2: 86.741,81.661 88.392,80.01 88.392,79.761 88.691,79.462 U4.33@88.696,79.462 ; U4.33 U4.33@88.696,79.462 ; 89.493,78.666 U4.33@88.696,79.462
  L1[SGN] w0.381: U1.4 67.184,81.346 67.448,81.61 67.598,81.61 67.966,81.978 68.631,81.978 68.949,81.661 86.741,81.661
GND: C1.1 C2.1 C3.1 C4.1 C5.1 C6.1 C7.1 C8.1 C9.2 C11.1 C14.1 C15.2 C16.1 C17.1 C18.1 C19.1 C20.1 C21.1 C22.1 D4.4 J1.A1 J1.B1 J1.S1 J1.S2 J1.S3 J1.S4 J3.1 J4.3 J7.1 J9.1 J10.4 R1.1 R2.1 R3.1 R5.1 R9.1 R15.1 R16.1 R19.1 SW2.1 T1.1 TH1.1 U1.2 U2.1 U4.8 U4.23 U4.35 U4.47 U6.4 U6.5 U6.6 U6.7 U6.14 U6.15 U6.16 U6.17 U7.1 U8.1 U8.5 U8.7 | length 221.6
  L1[SGN] w0.2: v1(53.848,88.392) 53.848,88.257 54.133,87.971 J1.S3 ; v1(54.102,75.692) 54.102,77.616 J1.S4 ; v1(55.245,64.516) 55.38,64.516 55.65,64.786 C1.1 ; v1(58.42,75.692) 58.42,77.531 J1.S2 ; v1(58.547,88.392) 58.547,88.257 58.303,88.013 J1.S1 58.413,86.188 58.413,85.373 58.613,85.173 J1.B1 60.327,85.173 61.468,86.314 R1.1 63.095,86.344 63.365,86.614 v1(63.5,86.614) ; J1.A1 58.613,78.773 58.413,78.573 58.413,77.758 J1.S2 ; R2.1 61.306,77.648 J1.S2 ; v1(61.849,72.898) 63.786,72.898 C2.1 ; v1(62.484,82.423) 62.547,82.359 64.301,82.359 U1.2 ; U2.1 66.452,65.492 67.508,66.548 v1(68.58,66.548) ; R3.1 67.652,60.475 67.652,46.844 70.536,43.96 79.904,43.96 84.985,49.041 84.985,53.191 v1(81.788,56.388) ; U7.1 70.887,108.098 73.946,108.098 77.522,104.521 v1(79.756,104.521) ; R9.1 v1(71.374,56.388) ; v1(73.66,76.962) 73.795,76.962 74.049,76.708 J10.4 ; R16.1 v1(79.756,85.471) ; v1(80.772,70.993) 80.814,70.993 82.089,72.268 U8.1 ; v1(82.042,66.929) 83.53,68.417 84.093,68.417 C21.1 ; v1(83.312,63.119) 83.334,63.119 85.222,65.007 C4.1 85.716,65.007 88.565,62.158 C3.1 86.837,60.421 86.837,59.913 v1(86.741,59.817) ; U8.7 83.97,71.136 83.44,71.666 82.732,71.666 U8.1 ; v1(84.963,80.899) 85.04,80.899 85.912,80.027 C20.1 86.717,80.027 U4.35 ; U8.5 85.101,72.268 85.084,72.285 83.846,72.285 83.811,72.25 82.573,72.25 82.556,72.268 U8.1 ; C8.1 87.763,70.416 88.906,71.559 C7.1 cw(c88.969,72.39) v1(88.138,72.39) ; U4.47 94.071,75.041 95.875,75.041 96.352,74.564 U4.8 97.547,73.44 98.882,73.44 C18.1 99.051,73.334 100.448,71.937 C17.1 100.531,71.918 100.531,71.355 100.203,71.027 v1(100.203,70.358) ; U4.23 95.778,83.113 C19.1 96.448,83.113 v1(97.536,84.201) ; R15.1 v1(98.806,89.027) ; TH1.1 v1(99.06,86.487) ; C16.1 99.229,80.288 101.449,80.288 v1(101.473,80.264) ; v1(100.711,60.452) 100.807,60.548 101.061,60.548 C5.1 ; v1(105.283,55.753) 105.418,55.753 105.672,55.499 C15.2 ; C6.1 106.933,65.714 108.385,64.262 v1(108.458,64.262) ; v1(107.315,43.561) 107.315,43.696 107.569,43.95 C11.1 ; C22.1 107.848,89.748 107.848,91.653 R19.1 v1(109.728,91.821) ; J7.1 112.641,83.566 112.895,83.312 v1(113.03,83.312) ; D4.4 111.995,111.125 v1(119.253,111.125) ; U6.17 U6.16 ; U6.14 U6.15 U6.16 ; U6.4 U6.5 ; J9.1 J4.3 ; v1(123.063,92.837) 123.198,92.837 123.429,92.606 J3.1 130.66,92.606 T1.1 132.223,90.821 R5.1 ; SW2.1 123.502,47.498 v1(126.746,47.498) ; v1(124.46,63.881) 124.396,63.817 122.53,63.817 U6.7 U6.6 U6.5 ; C14.1 127.516,65.802 127.881,66.167 v1(128.016,66.167) ; C9.2 136.202,78.425 136.39,78.613 v1(136.525,78.613) ; U6.16 U6.5
  other v1: 119.126,71.374 130.556,86.614
GREEN: J5.4 R12.2 U4.25 | length 29.8
  L1[SGN] w0.2: J5.4 88.519,90.424 92.456,86.487 92.456,82.619 U4.25
  L4[SGN] w0.2: J5.4 92.241,96.432 103.655,96.432 R12.2
LDR: C22.2 J7.2 Q1.2 R19.2 U4.15 | length 36
  L1[SGN] w0.2: U4.15 97.095,78.807 96.158,77.87 96.158,77.705 97.141,76.722 97.307,76.722 98.055,77.47 99.07,77.47 100.247,76.292 100.422,76.292 v2(102.743,78.613) ; R19.2 105.848,91.653 105.848,89.748 C22.2 105.934,87.49 105.566,87.122 105.566,84.647 106.195,84.018 J7.2 107.774,83.566 113.156,88.948 Q1.2
  L4[SGN] w0.2: v2(102.743,78.613) 106.195,82.065 J7.2
NetB1_N: B1.N D2.A T1.3 | length 12.4
  L1[SGN] w0.2: T1.3 138.699,90.932 D2.A 144.547,90.82 B1.N
NetD1_1: D1.1 R3.2 | length 4.1
  L1[SGN] w0.2: D1.1 64.375,61.722 65.264,60.833 R3.2
NetD4_1: D4.1 R12.1 | length 5.2
  L1[SGN] w0.2: v2(106.045,99.314) 106.072,99.314 106.127,99.369 D4.1
  L4[SGN] w0.2: R12.1 105.521,98.79 v2(106.045,99.314)
NetD4_2: D4.2 R13.1 | length 4.8
  L1[SGN] w0.2: D4.2 111.506,99.352 v2(111.506,96.901)
  L4[SGN] w0.2: R13.1 110.735,94.869 111.202,95.336 111.202,95.343 111.506,95.647 v2(111.506,96.901)
NetD4_3: D4.3 R14.1 | length 5.2
  L1[SGN] w0.2: v2(114.029,96.918) D4.3
  L4[SGN] w0.2: v2(114.029,96.918) 114.029,96.903 115.936,94.996 R14.1
NetD5_1: D5.1 R16.2 | length 3.3
  L1[SGN] w0.2: D5.1 73.926,88.51 73.926,85.586 R16.2
NetJ1_A5: J1.A5 R2.2 | length 2.7
  L1[SGN] w0.2: J1.A5 58.925,80.264 59.563,80.264 60.214,79.613 R2.2
NetJ1_B5: J1.B5 R1.2 | length 3.3
  L1[SGN] w0.2: J1.B5 59.877,82.723 61.468,84.314 R1.2
NetJ6_1: J6.1 U6.3 | length 4.9
  L1[SGN] w0.2: U6.3 125.364,58.674 J6.1
NetJ6_2: J6.2 U6.8 | length 5.3
  L1[SGN] w0.2: U6.8 124.412,65.024 J6.2
NetR4_2: R4.2 R5.2 T1.2 | length 5
  L1[SGN] w0.2: T1.2 133.604,87.353 134.216,86.741 R5.2 134.366,86.598 R4.2
NRST: C11.2 R8.2 SW2.2 U4.7 | length 37.7
  L1[SGN] w0.2: U4.7 97.263,73.017 97.263,72.917 v2(97.282,72.898) ; C11.2 110.982,47.228 SW2.2 110.728,47.514 R8.2 110.728,52.916 110.871,53.059 v2(110.871,53.086)
  L4[SGN] w0.2: v2(97.282,72.898) 97.282,68.961 96.139,67.818 v2(110.871,53.086)
NTC: C16.2 J7.3 R11.1 TH1.2 U4.14 | length 14.7
  L1[SGN] w0.2: v2(96.775,77.725) 96.775,77.735 97.483,78.443 U4.14 ; v2(97.218,80.995) 97.718,81.495 C16.2 98.86,82.748 98.86,83.167 99.03,83.337 TH1.2 99.175,83.451 102.12,83.451 J7.3 102.235,85.8 101.675,86.36 R11.1
  L4[SGN] w0.2: v2(96.775,77.725) 96.775,78.417 96.843,78.486 95.993,79.336 95.993,79.77 v2(97.218,80.995)
OSC32_IN: C4.2 U4.3 X2.2 | length 11.4
  L1[SGN] w0.2: C4.2 87.143,66.442 88.777,66.442 X2.2 91.054,68.63 91.761,68.63 95.131,72.001 95.131,72.249 94.655,72.726 U4.3
OSC32_OUT: C3.2 U4.4 X2.1 | length 12.1
  L1[SGN] w0.2: C3.2 89.988,64.035 91.145,65.192 91.145,65.598 X2.1 95.531,69.985 95.531,72.556 95.008,73.079 U4.4
OSC_IN: C5.2 U4.5 X1.1 | length 15.2
  L1[SGN] w0.2: U4.5 97.42,71.446 97.42,67.271 X1.1 99.973,64.718 102.686,64.718 C5.2
OSC_OUT: C6.2 U4.6 X1.2 | length 15.4
  L1[SGN] w0.2: U4.6 96.033,73.539 96.033,73.468 96.116,73.385 97.82,71.682 97.82,70.836 99.625,69.031 103.437,69.031 X1.2 103.862,68.607 106.29,68.607 C6.2
PA6: U4.16 U6.1 | length 40.8
  L1[SGN] w0.2: U4.16 96.847,79.161 97.323,79.637 97.572,79.637 97.58,79.629 v2(98.171,79.629) ; U6.1 v2(124.841,56.134)
  L4[SGN] w0.2: v2(98.171,79.629) 98.171,78.867 120.904,56.134 v2(124.841,56.134)
PA7: U4.17 U6.11 | length 22.2
  L1[SGN] w0.2: U4.17 96.493,79.514 97.055,80.076 97.39,80.076 v2(97.409,80.095) ; v2(111.252,67.564) U6.11
  L4[SGN] w0.2: v2(97.409,80.095) 98.721,80.095 v2(111.252,67.564)
PA8: J5.8 U4.29 | length 20.1
  L1[SGN] w0.2: J5.8 79.72,92.71 79.773,92.67 cw(c79.653,92.51) 79.823,92.616 79.837,92.593 79.845,92.567 cw(c79.653,92.51) 79.85,92.542 ccw(c80.899,92.71) 81.775,92.109 cw(c81.939,91.995) 82.119,92.081 ccw(c83.439,92.71) 83.376,91.249 90.319,84.306 90.319,83.452 89.796,82.928 89.796,81.544 89.889,81.452 89.889,81.31 89.935,81.264 89.935,81.122 90.412,80.645 U4.29
PA9: D5.2 J5.9 U4.30 | length 23.7
  L1[SGN] w0.2: J5.9 75.819,88.65 D5.2 84.963,88.646 89.396,84.213 89.396,80.954 89.657,80.693 89.74,80.61 89.74,80.539 U4.30
PA10: J5.10 U4.31 | length 33.1
  L1[SGN] w0.2: J5.10 73.279,90.541 73.162,90.424 70.475,90.424 70.358,90.307 70.358,83.312 70.485,83.185 86.36,83.185 86.362,83.187 86.485,83.187 86.886,82.786 86.951,82.786 88.214,81.524 88.214,81.396 89.705,79.905 U4.31
PB8: U4.45 U6.9 | length 92.8
  L1[SGN] w0.2: v2(89.916,72.39) 89.943,72.39 90.703,73.15 U4.45 ; v2(120.396,66.294) U6.9
  L4[SGN] w0.2: v2(89.916,72.39) 89.916,53.086 93.345,49.657 130.937,49.657 131.064,49.784 131.064,66.294 130.541,66.817 120.919,66.817 v2(120.396,66.294)
PB9: U4.46 U6.2 | length 52.1
  L1[SGN] w0.2: U4.46 91.119,72.726 90.642,72.249 90.642,71.432 90.96,71.114 90.96,70.297 89.088,68.425 87.895,68.425 86.054,66.583 86.054,66.216 97.721,54.549 118.887,54.549 121.742,57.404 U6.2
PB11: J5.3 U4.22 | length 15.7
  L1[SGN] w0.2: U4.22 94.725,81.282 95.286,81.842 95.304,81.842 v2(95.622,82.16)
  L4[SGN] w0.2: J5.3 91.059,83.439 94.344,83.439 v2(95.622,82.16)
PB15: J5.7 U4.28 | length 17.7
  L1[SGN] w0.2: J5.7 82.26,92.71 82.313,92.67 cw(c82.193,92.51) 82.363,92.616 82.377,92.593 82.385,92.567 cw(c82.193,92.51) 82.39,92.542 ccw(c83.439,92.71) 83.744,91.693 83.934,91.75 ; 83.935,91.75 84.018,91.75 90.719,85.049 90.719,83.286 90.196,82.763 90.196,81.71 90.289,81.617 90.289,81.476 90.447,81.317 U4.28
PIR: J5.2 R15.2 U4.21 U7.2 | length 43.2
  L1[SGN] w0.2: U7.2 73.65,107.107 73.65,106.278 82.117,97.812 91.128,97.812 93.599,95.341 J5.2 93.599,89.059 R15.2 93.631,85.31 92.856,84.535 92.856,82.453 92.767,82.364 92.767,80.842 92.884,80.725 93.265,80.725 93.853,80.137 94.146,80.137 94.937,80.928 U4.21
RED: J5.5 R13.2 U4.26 | length 39
  L1[SGN] w0.2: J5.5 85.979,91.567 92.056,85.49 92.056,83.492 90.996,82.431 90.996,82.183 91.473,81.706 U4.26
  L4[SGN] w0.2: J5.5 87.041,91.648 88.959,91.648 89.789,92.478 89.789,92.942 90.619,93.772 107.601,93.772 108.698,94.869 R13.2
SCL: R17.2 U4.42 U8.4 | length 9.2
  L1[SGN] w0.2: U8.4 84.252,74.388 R17.2@84.252,76.149 ; R17.2 R17.2@84.252,76.149 ; U4.42 89.634,74.211 89.157,73.734 88.184,73.734 85.769,76.149 R17.2@84.252,76.149
SDA: R18.1 U4.43 U8.3 | length 9.3
  L1[SGN] w0.2: R18.1 81.732,74.93 U8.3 83.687,73.399 83.752,73.334 89.464,73.334 89.988,73.857 U4.43
Servo: J3.3 J4.2 U4.18 | length 46.1
  L1[SGN] w0.2: U4.18 96.746,80.545 97.788,80.545 98.496,81.253 119.988,81.253 123.421,84.686 J3.3 126.365,75.682 126.609,75.438 J4.2
SWCLK: J10.2 U4.37 | length 19.5
  L1[SGN] w0.2: 78.867,74.168 79.982,75.283 80.67,75.283 81.379,75.991 82.015,75.991 82.618,76.594 83.142,76.594 83.864,77.316 86.599,77.316 U4.37
  L1[SGN] w0.381: J10.2 78.867,68.834 78.867,74.168
SWDIO: J10.3 U4.34 | length 32.8
  L1[SGN] w0.15: v2(87.91,79.528) 88.631,78.807 U4.34
  L1[SGN] w0.381: v2(70.612,71.501) 70.739,71.628 J10.3
  L4[SGN] w0.381: v2(70.612,71.501) 70.612,79.708 70.835,79.931 87.507,79.931 v2(87.91,79.528)
USART_RX: J9.3 U4.13 | length 25.3
  L1[SGN] w0.2: U4.13 98.867,79.13 122.287,79.13 J9.3
USART_TX: J9.2 U4.12 | length 25.1
  L1[SGN] w0.2: U4.12 98.155,75.66 98.225,75.66 98.375,75.81 110.053,75.81 110.425,75.438 J9.2
USB_N: J1.A7 J1.B7 U1.1 | length 9.1
  L1[SGN] w0.2: J1.B7 58.833,80.773 58.189,80.773 57.912,81.05 57.912,82.106 58.029,82.223 J1.A7 58.906,82.2 59.927,82.2 60.973,83.246 U1.1
USB_P: J1.A6 J1.B6 U1.3 | length 6.2
  L1[SGN] w0.2: J1.A6 J1.B6 59.553,81.723 59.576,81.746 63.259,81.746 63.659,81.346 U1.3
VBUS: C2.2 J1.A4 J1.B4 U1.5 U2.3 | length 45.4
  L1[SGN] w0.2: 58.128,84.112 57.512,83.495 57.512,80.45 58.189,79.773 58.683,79.773 J1.A4 ; v2(59.944,84.328) 59.917,84.328 59.872,84.373 J1.B4 58.683,84.173 58.138,84.173 58.102,84.138 57.69,84.138 57.003,84.824 57.003,87.768 58.278,89.042 61.991,89.042 65.269,85.764 65.269,82.996 65.969,82.296 U1.5 ; v2(65.913,74.549) C2.2 65.913,70.319 U2.3
  L4[SGN] w0.2: v2(59.944,84.328) 61.351,82.921 61.351,81.905 62.738,80.518 65.796,80.518 65.913,80.401 v2(65.913,74.549)
pads on no net: J1. J1.A8 J1.B8 U4.2 U4.10 U4.11 U4.38 U4.39 U4.40 U4.41 U6.12 U6.13 U6.18 U6.19

## Polygon pours and split planes (outlines as drawn)
+5 on L4[SGN] "+5_L04_P003" (solid, remove dead copper, pour order 3): 132.461,78.594 128.905,77.586 128.905,67.945 128.143,67.183 121.158,67.183 121.158,68.707 125.603,68.707 125.603,80.391 125.857,80.645 132.461,80.909
+3V3 on L4[SGN] "+3V3_L04_P011" (solid, remove dead copper, pour order 11): 102.743,86.741 102.743,85.852 109.601,85.852 109.601,87.757 108.077,87.757 107.95,87.884 107.95,86.614 104.267,86.614 104.267,86.995 102.997,86.995
+3V3 on L4[SGN] "+3V3_L04_P015" (solid, remove dead copper, pour order 15): 109.71,56.188 111.941,56.188 ccw(c111.941,56.261) 112.014,56.261 112.014,56.642 cw(c112.141,56.642) 112.141,56.769 114.427,56.769 ccw(c114.427,56.896) 114.554,56.896 114.554,50.038 107.696,50.038 ccw(c107.696,49.911) 107.569,49.911 107.569,52.578 cw(c108.204,52.578) 108.204,53.213 109.728,53.213 cw(c109.728,53.086) 109.855,53.086 109.855,50.927 111.633,50.927 ccw(c111.633,51.054) 111.76,51.054 111.76,54.61 ccw(c111.633,54.61) 111.633,54.737 109.728,54.737 ccw(c109.728,54.61) 109.601,54.61 109.601,56.078 cw(c109.71,56.078)
+5 on L4[SGN] "+5_L04_P004" (solid, remove dead copper, pour order 4): 139.446,95.123 139.446,93.091 139.319,93.218 137.795,93.218 137.795,80.01 137.287,79.502 133.35,79.502 133.35,81.407 133.35,81.915 134.366,81.915 136.779,84.328 136.779,95.123
+3V3 on L1[SGN] "NONET_L01_P-001" (solid, remove dead copper, pour order 22): 87.63,78.613 cw(c87.376,78.613) 87.376,78.359 87.249,78.359 89.408,76.2 89.408,76.073 94.361,76.073 94.488,75.946 94.488,75.184 96.012,75.184 97.028,74.168 97.409,74.549 96.266,75.819 87.757,78.613
+3V3 on L1[SGN] "+3V3_L01_P012" (solid, remove dead copper, pour order 12): 94.234,82.55 94.424,82.359 94.424,82.233 93.599,81.407 95.989,79.017 95.989,75.705 94.882,75.705 94.742,75.565 93.408,76.898 93.408,81.724
+3V3 on L1[SGN] "+3V3_L01_P016" (solid, remove dead copper, pour order 16): 77.851,60.198 71.501,60.198 71.501,64.643 ccw(c68.961,64.643) 68.961,67.183 60.833,67.183 60.833,60.833 cw(c60.579,60.833) 60.579,60.579 58.166,60.579 ccw(c58.166,60.325) 57.912,60.325 58.42,66.167 56.388,66.167 cw(c56.388,66.294) 56.261,66.294 56.261,69.723 cw(c56.515,69.723) 56.515,69.977 63.627,69.977 cw(c63.627,69.596) 64.008,69.596 ccw(c65.024,69.596) 65.024,68.58 72.009,68.58 cw(c72.009,67.818) 72.771,67.818 72.771,65.151 ccw(c74.295,65.151) 74.295,63.627 77.851,63.627
+3V3 on L1[SGN] "+3V3_L01_P017" (solid, remove dead copper, pour order 17): 90.96,70.297 89.088,68.425 87.884,69.215 84.424,68.125 84.752,72.112 83.82,72.644 85.598,71.628 87.757,69.596 90.043,71.12
+3V3 on L1[SGN] "+3V3_L01_P020" (solid, remove dead copper, pour order 20): 80.115,75.739 85.647,78.197 88.265,77.47 88.519,77.724 87.122,79.121 84.836,79.502 80.68,77.759 79.443,76.522 79.502,76.454
+3V3 on L1[SGN] "+3V3_L01_P009" (solid, remove dead copper, pour order 9): 93.599,81.407 93.218,81.788 93.218,84.074 94.869,85.725 95.885,84.709 95.885,83.693 95.25,83.058
+3V3 on L1[SGN] "+3V3_L01_P010" (solid, remove dead copper, pour order 10): 94.488,83.693 98.171,87.376 102.616,87.376 102.616,85.598 104.394,85.598 104.521,85.725 104.255,85.991 104.255,88.392 97.282,88.392 93.599,84.709 93.599,84.455 93.726,84.455 93.853,84.328 93.726,84.455 93.853,84.328
GND on L3[GND] "GND_L03_P007" (solid, remove dead copper, pour order 7): 54.483,116.586 ccw(c54.451,111.855) 49.72,111.887 49.72,47.354 ccw(c54.697,47.394) 54.737,42.418 148.209,42.418 ccw(c148.249,47.521) 153.352,47.481 153.352,111.523 ccw(c148.416,111.523) 148.416,116.459
GND on L2[GND] "GND_L02_P014" (solid, remove dead copper, pour order 14): 54.657,116.586 ccw(c54.657,111.586) 49.657,111.586 49.657,47.418 ccw(c54.657,47.418) 54.657,42.418 148.289,42.418 ccw(c148.289,47.418) 153.289,47.418 153.289,111.586 ccw(c148.289,111.586) 148.289,116.586

## Silkscreen, mask and mechanical layers (free items; w line width, h text height)
Top Overlay:
  drawing of 53 lines, arcs and shapes, not listed
  text "PIR" at 78.232,108.585 h1.52
  text "RGB" at 102.108,103.141 h1.52
  text "BUZZER" at 146.939,84.472 h1.52
  text "USB" at 51.054,73.804 h1.52
  text "5-9-2026" at 133.223,45.466 h1.52
  text "Team 6" at 133.477,43.579 h1.52
Mechanical 1:
  the board outline again, w0.2

## Text inside footprints (layer, text, board x,y; h text height)
J1: Top 3D Body "PCB EDGE" at 52.245,86.423 h0.61 r270
U7: Top Overlay "RefDes" at 68.199,101.727 h1.27; Top Overlay "REFDES" at 69.596,104.394 h1.27; Top 3D Body "RefDes2" at 69.551,104.757 h1.27